# Altium PCB main.PcbDoc
Units mm, origin at the board's own origin, x right, y up, seen from the top; angles counter-clockwise.
Board outline 72.28 x 48.95 mm, 2 copper layers (Top Layer, Bottom Layer); 13 components, 7 nets, 39 pads, 138 vias.
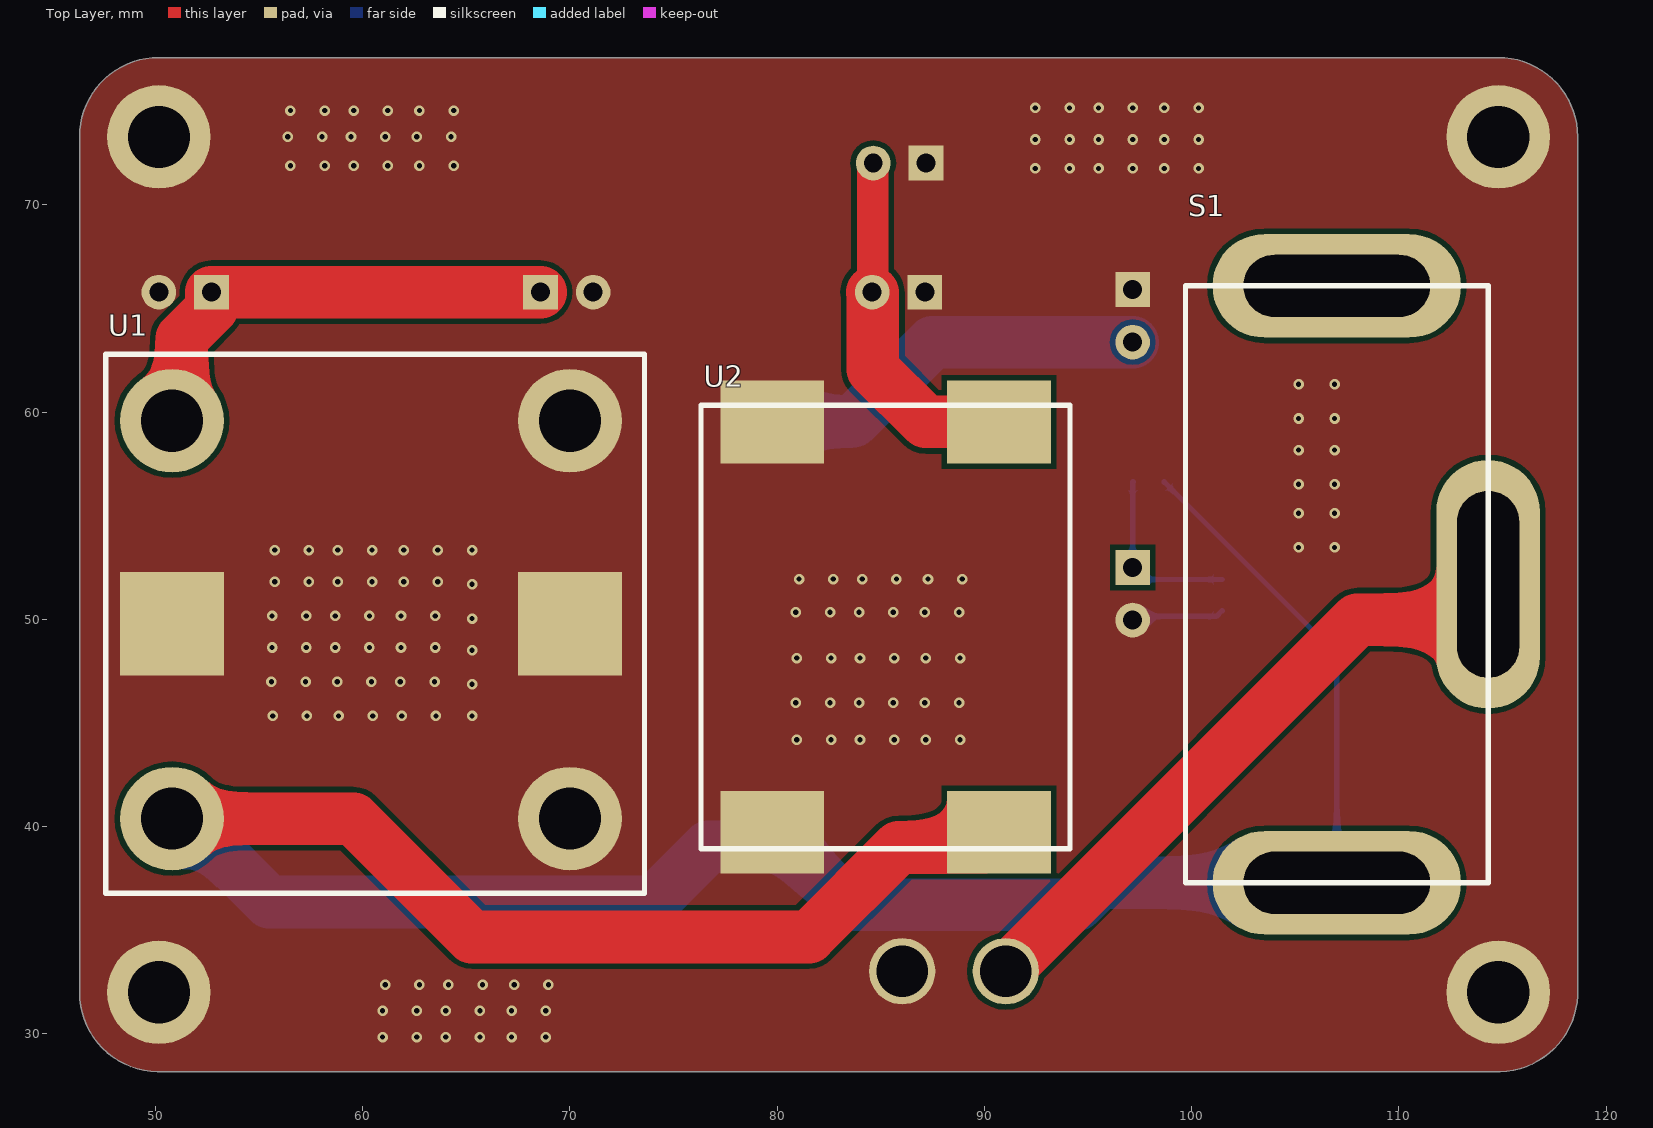
[diagram p0: Top Layer view]
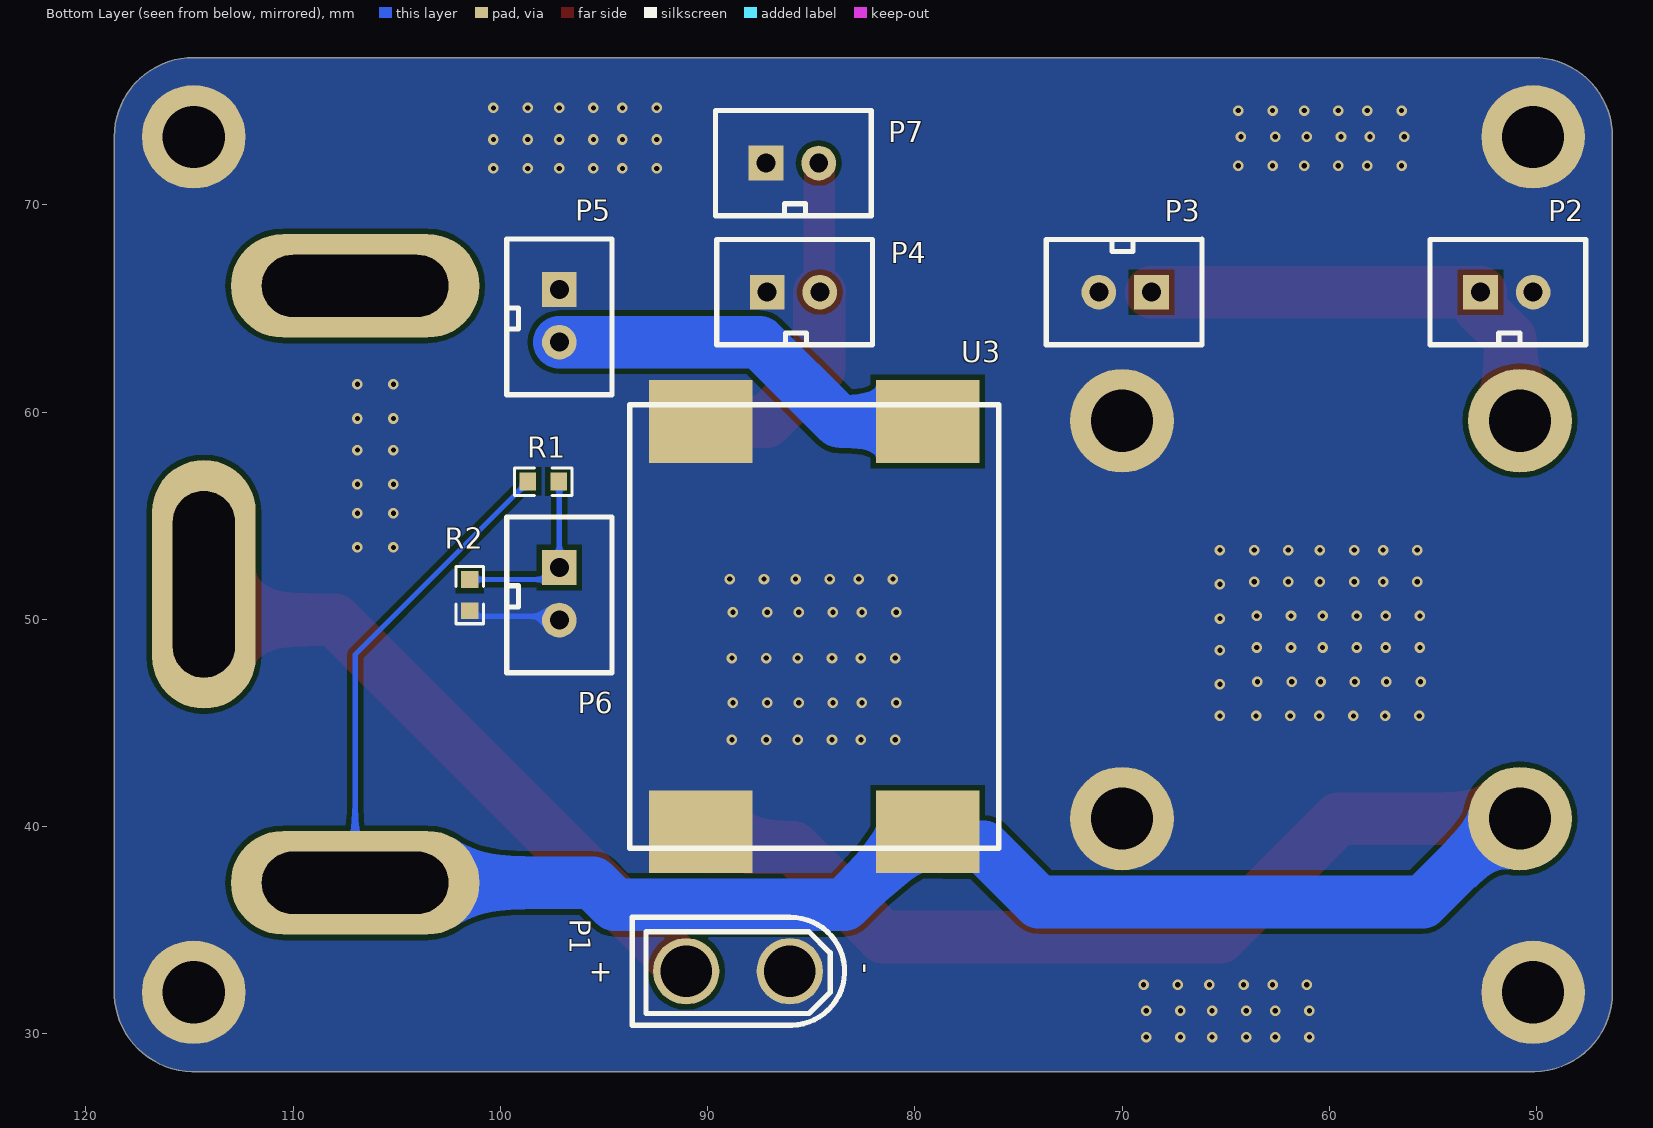
[diagram p1: Bottom Layer view, seen from below]

## Layer stack, top to bottom
Top Solder: solder mask 0.0102, Solder Resist, Dk 3.5
Top Layer: signal copper 0.0356
Dielectric 1: dielectric 0.32, FR-4, Dk 4.8
Bottom Layer: signal copper 0.0356
Bottom Solder: solder mask 0.0102, Solder Resist, Dk 3.5

## Board outline
46.338,32.004 cw(c46.465,32.004) 46.355,32.068 46.355,73.215 cw(c46.465,73.279) 46.338,73.279 cw(c50.165,73.279) 50.165,77.106 cw(c50.165,76.979) 50.166,77.106 114.791,77.106 cw(c114.791,73.279) 118.618,73.279 cw(c118.491,73.279) 118.618,73.278 118.618,32.004 cw(c118.491,32.004) 118.618,32.004 cw(c114.791,32.004) 118.618,32.004 118.618,31.877 cw(c118.491,31.877) 118.615,31.849 cw(c114.791,32.004) 114.884,28.178 cw(c114.819,28.287) 114.819,28.16 50.165,28.16 cw(c50.165,28.287) 50.101,28.177 cw(c50.165,32.004)

## Design rules (kind name [scope] priority, off if disabled: settings)
Clearance [All] p1: gap=0.254 ignorepadtopadclearanceinfootprint=FALSE except(0: Arc-Hole Track-Hole SMDPad-Hole THPad-Hole Via-Hole Fill-Hole Poly-Hole Region-Hole Text-Hole)
PolygonConnect [All] p1: connectstyle=Direct reliefconductorwidth=0.254 reliefentries=4 polygonreliefangle="90 Angle" airgapwidth=0.254
RoutingVias [All] p1: holewidth=0.711 width=1.27 viastyle="Through Hole" minholewidth=0.711 minwidth=1.27 maxholewidth=0.711 maxwidth=1.27
SolderMaskExpansion [All] p1: expansion=0.102
Width [All] p1: maxlimit=2.54 minlimit=0.254 preferedwidth=1.524
30 further rules are at their usual default settings.

## Components (designator, comment, footprint, x,y, rotation, side; value= is the part's Value field where it differs from the comment)
P1 "Header 2" CONN-TH_XT30UPB-M 88.011,33.02 r0 bottom
P2 "Header 2" XH2.54-2A 51.383,65.781 r180 bottom
P3 "Header 2" XH2.54-2A 69.902,65.791 r0 bottom
P4 "Header 2" XH2.54-2A 85.8,65.781 r180 bottom
P5 "Header 2" XH2.54-2A 97.155,64.591 r270 bottom
P6 "Header 2" XH2.54-2A 97.155,51.181 r270 bottom
P7 "Header 2" XH2.54-2A 85.852,72.009 r180 bottom
R1 "Res1" R0603 97.011,56.493 r0 bottom value=300K
R2 "Res1" R0603 101.622,50.257 r90 bottom value=100K
S1 "SW-SPDT" switch 114.3,66.089 r270 top
U1 "5V" 5V_8A 50.8,59.584 r0 top
U2 "7.4V" PCBComponent_1 76.327,60.325 r0 top
U3 "9V" PCBComponent_1 93.75,60.351 r180 bottom

## Footprints (in the part's own frame and the unit in brackets; to place one, negate y for a bottom-side part, rotate by r counter-clockwise, add the part's x,y. Pads: shape width x height; smd on the part's side, far side on the other; paste and mask are expansions set on the pad)
5V_8A [mm]
  round 5 hole 3: 0(0,-19.2) 1(19.2,-19.2) 2(0,0) 3(19.2,0)
  rect 5x5 smd: 4(0,-9.8) 5(19.2,-9.8)
  silkscreen extent -3.2,-22.8 22.8,3.2
CONN-TH_XT30UPB-M [mm]
  round 3.2 hole 2.5: 1(-1.982,0) 2(3.018,0)
  silkscreen extent -4.63,-2.6 5.62,2.6
PCBComponent_1 [mm]
  rect 5x4 smd: 0(14.375,-20.6) 1(3.425,-20.6) 2(14.375,-0.8) 3(3.425,-0.8)
  silkscreen extent 0,-21.4 17.8,0
R0603 [mm]
  rect 0.806x0.864 smd: 1(0.162,-0.149) 2(1.668,-0.149)
  silkscreen extent -0.47,-0.81 2.3,0.51
switch [mm]
  oval 5x12 hole 3 slot 9 at 90 deg: 1(0,-7.3) 3(28.8,-7.3)
  oval 12x5 hole 3 slot 9 at 0 deg: 2(14.4,0)
  silkscreen extent 0,-14.6 28.8,0
XH2.54-2A [mil]
  rect 66x66 hole 36: 1(-52.05,0.2)
  round 66 hole 36: 2(47.95,0.2)
  silkscreen extent -148,-100 148,100

## Part data
P1 P2 P3 P4 P5 P6 P7: "Header, 2-Pin", LatestRevisionDate=17-Jul-2002, LatestRevisionNote="Re-released for DXP Platform.", Publisher="Altium Limited"
R1 R2: "Resistor", LatestRevisionDate=17-Jul-2002, LatestRevisionNote="Re-released for DXP Platform.", PackageDescription="Axial Device, Thru-Hole; 2 Leads; 0.3 in Pin Spacing", PackageReference=AXIAL-0.3, Published=8-Jun-2000, Publisher="Altium Limited"
S1: "SPDT Subminiature Toggle Switch, Right Angle Mounting, Vertical Actuation", ComponentLink1Description="Manufacturer Link", ComponentLink1URL=http://www.apem.com, DatasheetVersion=05-Dec-2000, LatestRevisionDate=17-Dec-2003, LatestRevisionNote="Schematic revised, PCB Footprint replaced.", PackageDescription="Switch; 4 Leads", PackageReference=TL36WW15050, Published=24-Mar-1999, Publisher="Altium Limited"
U1: library part 5V_8A
U2: library part 7_4V

## Free pads (board coordinates)
  round 5 hole 3: 0(50.165,73.279) 1(114.791,73.279) 2(50.165,32.004) 3(114.791,32.004)

## Via types
v1: diameter 0.508, hole 0.254, Top Layer to Bottom Layer, 138 vias

## Nets (pads, with @x,y where several pads share a name; then routed paths per layer and width w, separated by ;. In a path a pad name is that pad's centre, name@x,y a point inside that pad or via, vN(x,y) a via of type N, cw(c..) or ccw(c..) an arc to the next point about the centre after c; other vN are vias at no path point)
5V: P2.1 P3.1 U1.2 | length 22.9
  Top Layer w2.54: U1.2 51.271,60.055 51.271,63.551 52.705,64.985 P2.1 P3.1
7V4: P4.2 P7.2 U2.2 | length 17.1
  Top Layer w1.524: P4.2 84.608,65.812 84.608,71.988 P7.2
  Top Layer w2.54: P4.2 84.611,65.757 84.611,62.074 87.16,59.525 U2.2
9V: P5.2 U3.2 | length 19.4
  Bottom Layer w2.54: U3.2 83.67,59.551 87.492,63.373 P5.2
12V: R1.2 S1.3 U1.0 U2.0 U3.0 | length 128.3
  Top Layer w2.54: U1.0 59.554,40.384 65.267,34.671 81.534,34.671 85.858,38.995 89.972,38.995 U2.0
  Bottom Layer w0.254: R1.2 98.679,56.613 107,48.292 S1.3
  Bottom Layer w2.54: U1.0 51.466,40.384 55.49,36.36 74.024,36.36 76.685,39.021 78.645,39.021 U3.0 79.875,39.751 83.399,36.227 94.483,36.227 95.545,37.289 S1.3
12V_IN: P1.2 S1.2 | length 31.3
  Top Layer w2.54: P1.2 107.99,49.981 113.164,49.981 114.3,51.117 S1.2
GND: P1.1 P2.2 P3.2 P4.1 P5.1 P6.2 P7.1 pad.0 pad.1 pad.2 pad.3 R2.1 U1.1 U1.3 U1.4 U1.5 U2.1 U2.3 U3.1 U3.3 | length 4.5
  Bottom Layer w0.254: P6.2 97.329,50.143 101.197,50.143 R2.1
  other v1: 60.96,29.845 62.611,29.845 64.008,29.845 65.659,29.845 67.183,29.845 68.834,29.845 60.96,31.115 62.611,31.115 64.008,31.115 65.659,31.115 67.183,31.115 68.834,31.115 61.087,32.366 62.738,32.366 64.135,32.366 65.786,32.366 67.31,32.366 68.961,32.366 80.947,44.196 82.598,44.196 83.995,44.196 85.646,44.196 87.17,44.196 88.821,44.196 55.66,45.339 57.311,45.339 58.835,45.339 60.486,45.339 61.883,45.339 63.534,45.339 65.278,45.339 80.899,45.974 82.55,45.974 83.947,45.974 85.598,45.974 87.122,45.974 88.773,45.974 65.278,46.863 55.595,46.99 57.246,46.99 58.77,46.99 60.421,46.99 61.818,46.99 63.469,46.99 80.947,48.133 82.598,48.133 83.995,48.133 85.646,48.133 87.17,48.133 88.821,48.133 65.278,48.514 55.626,48.641 57.277,48.641 58.674,48.641 60.325,48.641 61.849,48.641 63.5,48.641 65.278,50.038 55.626,50.165 57.277,50.165 58.674,50.165 60.325,50.165 61.849,50.165 63.5,50.165 80.899,50.344 82.55,50.344 83.947,50.344 85.598,50.344 87.122,50.344 88.773,50.344 65.278,51.689 55.753,51.816 57.404,51.816 58.801,51.816 60.452,51.816 61.976,51.816 63.627,51.816 81.053,51.943 82.704,51.943 84.101,51.943 85.752,51.943 87.276,51.943 88.927,51.943 55.753,53.34 57.404,53.34 58.801,53.34 60.452,53.34 61.976,53.34 63.627,53.34 65.278,53.34 105.156,53.467 106.894,53.467 105.156,55.118 106.894,55.118 105.156,56.515 106.894,56.515 105.156,58.166 106.894,58.166 105.156,59.69 106.894,59.69 105.156,61.341 106.894,61.341 92.456,71.754 94.107,71.754 95.504,71.754 97.155,71.754 98.679,71.754 100.33,71.754 56.515,71.882 58.166,71.882 59.563,71.882 61.214,71.882 62.738,71.882 64.389,71.882 92.456,73.151 94.107,73.151 95.504,73.151 97.155,73.151 98.679,73.151 100.33,73.151 56.388,73.279 58.039,73.279 59.436,73.279 61.087,73.279 62.611,73.279 64.262,73.279 56.515,74.549 58.166,74.549 59.563,74.549 61.214,74.549 62.738,74.549 64.389,74.549 92.456,74.675 94.107,74.675 95.504,74.675 97.155,74.675 98.679,74.675 100.33,74.675
NetP6_1: P6.1 R1.1 R2.2 | length 8.7
  Bottom Layer w0.254: R1.1 97.15,56.619 P6.1 97.728,51.925 R2.2
pads on no net: S1.1

## Polygon pours and split planes (outlines as drawn)
GND on Top Layer "GND_L01_P000" (solid, remove dead copper, pour order 0): 46.338,32.004 cw(c46.465,32.004) 46.355,32.068 46.355,73.215 cw(c46.465,73.279) 46.338,73.279 cw(c50.165,73.279) 50.165,77.106 cw(c50.165,76.979) 50.166,77.106 114.791,77.106 cw(c114.791,73.279) 118.618,73.279 cw(c118.491,73.279) 118.618,73.278 118.618,32.004 cw(c118.491,32.004) 118.618,32.004 cw(c114.791,32.004) 118.618,32.004 118.618,31.877 cw(c118.491,31.877) 118.615,31.849 cw(c114.791,32.004) 114.884,28.178 cw(c114.819,28.287) 114.819,28.16 50.165,28.16 cw(c50.165,28.287) 50.101,28.177 cw(c50.165,32.004)
GND on Bottom Layer "GND_L02_P002" (solid, remove dead copper, pour order 2): 46.338,32.004 cw(c46.465,32.004) 46.355,32.068 46.355,73.215 cw(c46.465,73.279) 46.338,73.279 cw(c50.165,73.279) 50.165,77.106 cw(c50.165,76.979) 50.166,77.106 114.791,77.106 cw(c114.791,73.279) 118.618,73.279 cw(c118.491,73.279) 118.618,73.278 118.618,32.004 cw(c118.491,32.004) 118.618,32.004 cw(c114.791,32.004) 118.618,32.004 118.618,31.877 cw(c118.491,31.877) 118.615,31.849 cw(c114.791,32.004) 114.884,28.178 cw(c114.819,28.287) 114.819,28.16 50.165,28.16 cw(c50.165,28.287) 50.101,28.177 cw(c50.165,32.004)

## Other copper
Bottom Layer:
  region: 78.232,58.547
  region: 107.315,37.592

## Silkscreen, mask and mechanical layers (free items; w line width, h text height)
Mechanical 1:
  lines w0.254: 114.791,77.106 cw(c114.791,73.279) 118.618,73.279 cw(c118.491,73.279) 118.618,73.278 118.618,32.004 ; 114.791,77.106 114.791,77.106 ; 114.791,77.106 50.166,77.106 ccw(c50.165,76.979) 50.165,77.106 ccw(c50.165,73.279) 46.338,73.279 ccw(c46.465,73.279) 46.355,73.215 46.355,32.068 ccw(c46.465,32.004) 46.338,32.004 ccw(c50.165,32.004) 50.101,28.177 ccw(c50.165,28.287) 50.165,28.16 114.819,28.16 ccw(c114.819,28.287) 114.884,28.178 ccw(c114.791,32.004) 118.615,31.849 ; 118.615,31.849 ccw(c118.491,31.877) 118.618,31.877 118.618,32.004 ; 118.615,31.849 118.615,31.849 ; 118.618,32.004 ccw(c114.791,32.004) 118.618,32.004 ; 118.618,32.004 ccw(c118.491,32.004) 118.618,32.004

## Text inside footprints (layer, text, board x,y; h text height)
P1: Bottom Overlay "+" at 94.585,33.401 h1 r180; Bottom Overlay "-" at 82.806,33.401 h1 r90